# Altium PCB stm32f030F4P6-v2.00-定位孔.PcbDoc
Units mm, origin at the board's own origin, x right, y up, seen from the top; angles counter-clockwise.
Board outline 152.4 x 101.6 mm, 2 copper layers (Top Layer, Bottom Layer); 4 components, 25 nets, 32 pads, 0 vias.
Unrouted connection lines stored in the file: 7.
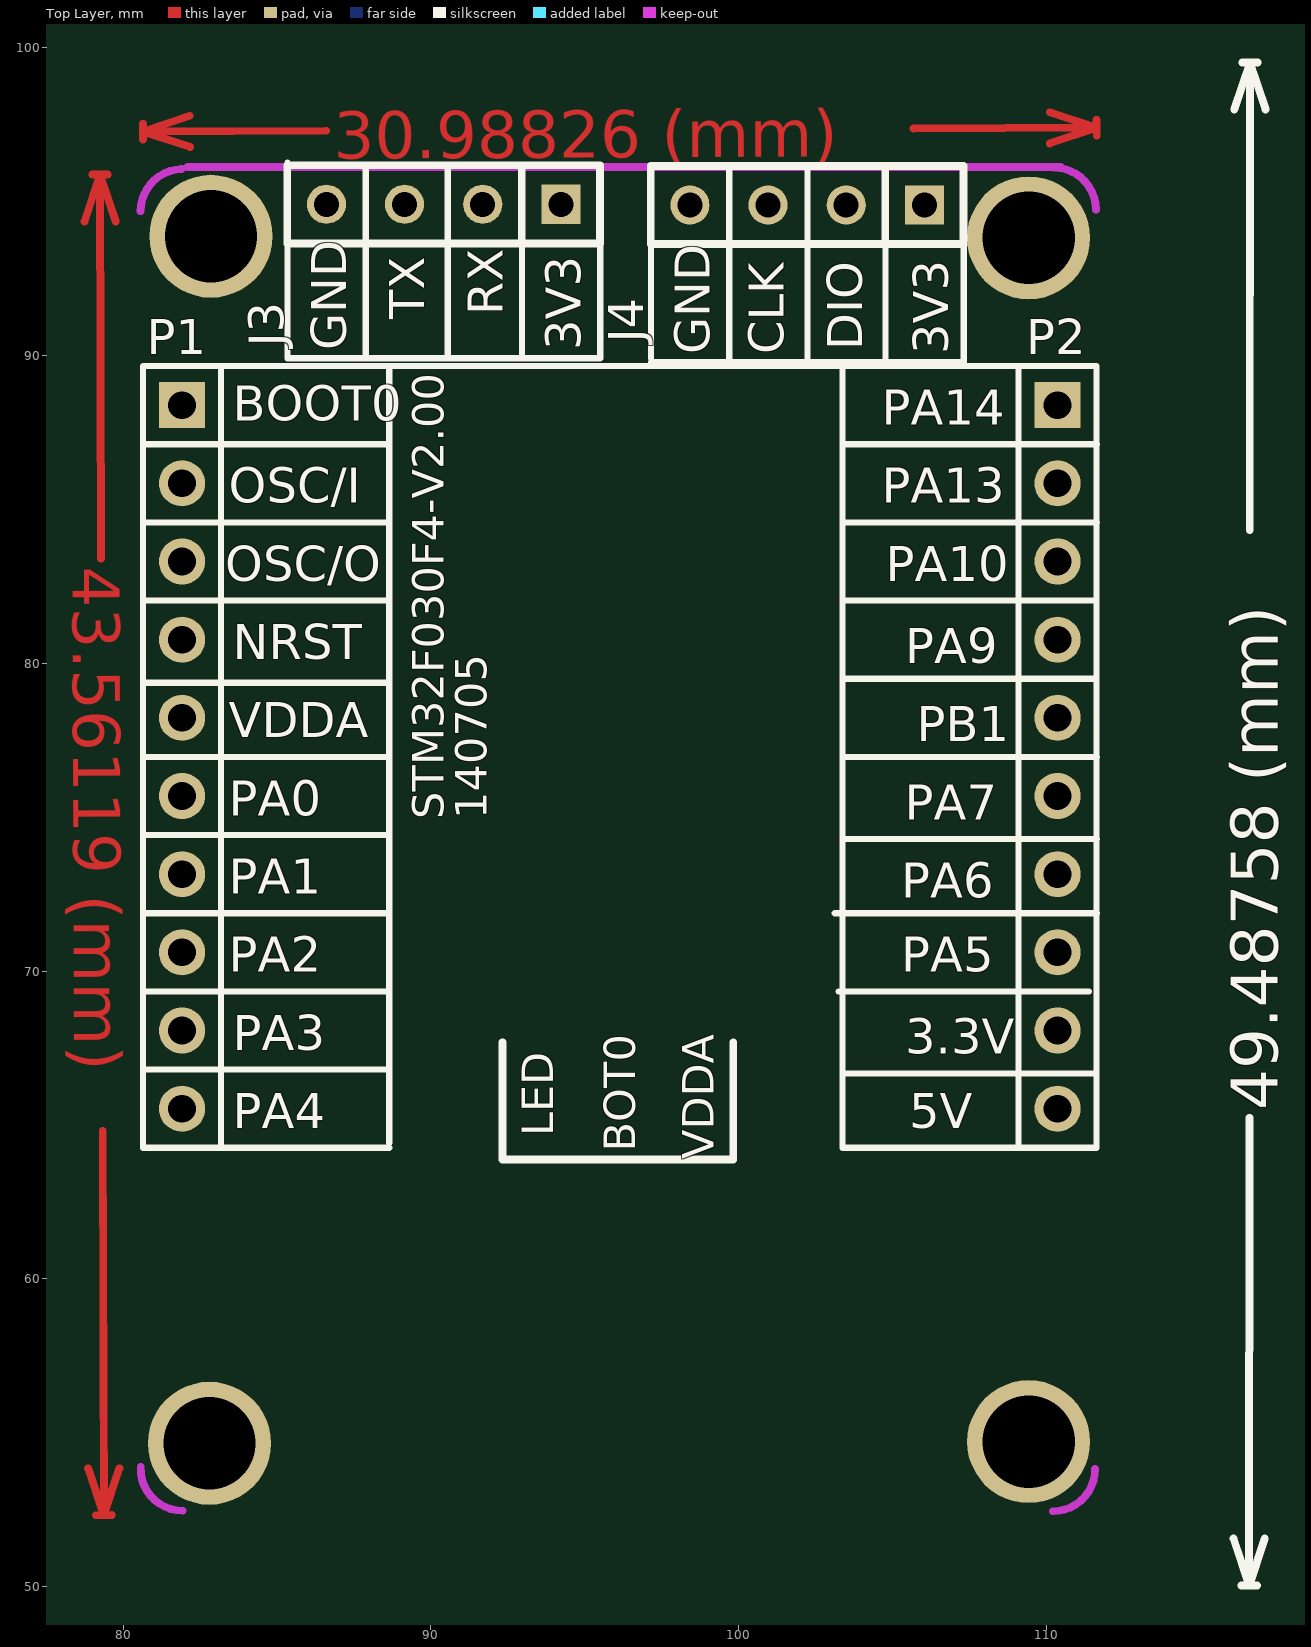
[diagram p0: Top Layer view]
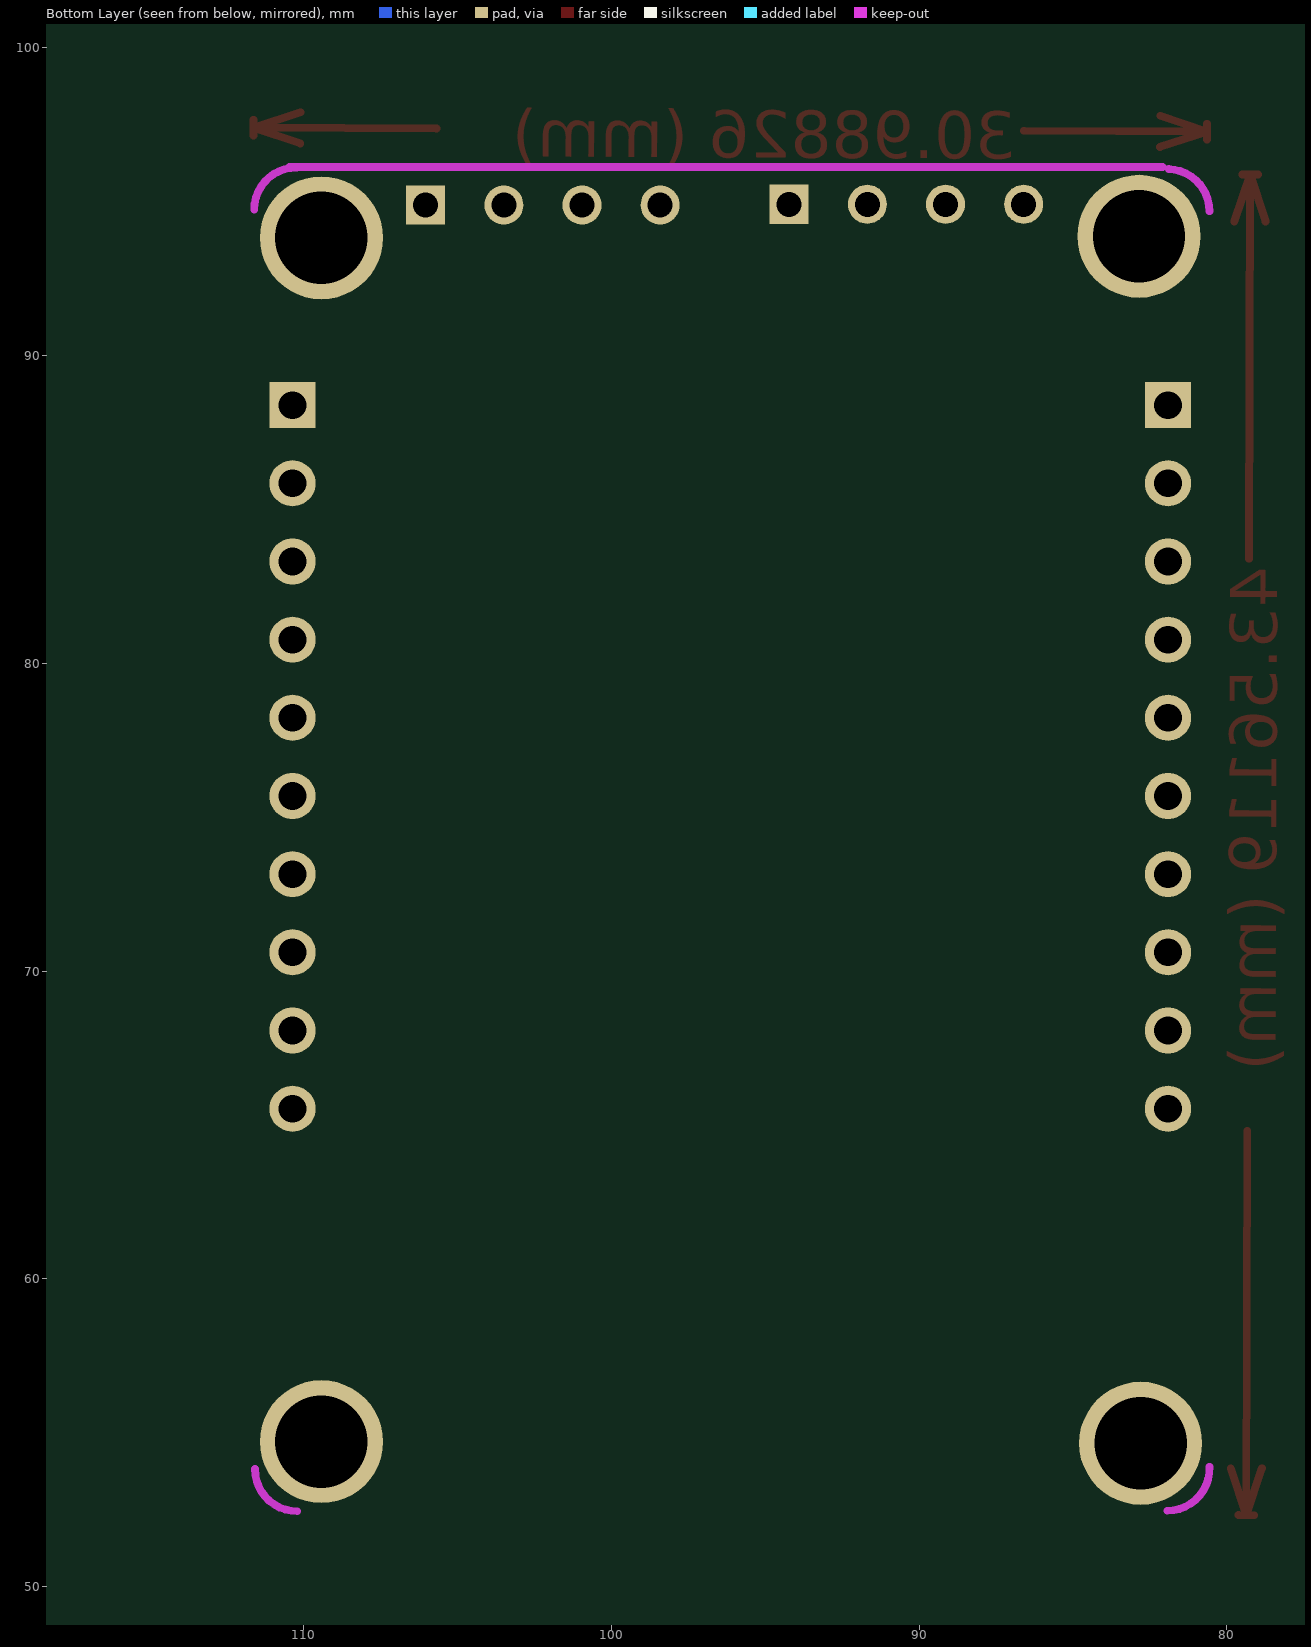
[diagram p1: Bottom Layer view, seen from below]

## Layer stack, top to bottom
Top Layer: signal copper 0.0356
Dielectric: dielectric 0.32, FR-4, Dk 4.8
Bottom Layer: signal copper 0.0356

## Board outline
25.4,25.4 177.8,25.4 177.8,127 25.4,127

## Design rules (kind name [scope] priority, off if disabled: settings)
Clearance [All] p1: gap=0.178
PolygonConnect [All] p1: connectstyle=Relief reliefconductorwidth=0.254 reliefentries=4 polygonreliefangle="90 Angle"
RoutingVias [All] p1: holewidth=0.711 width=1.27 viastyle="Through Hole" minholewidth=0.711 minwidth=1.27 maxholewidth=0.711 maxwidth=1.27
SilkscreenOverComponentPads [All] p1: minsilkscreentomaskgap=0.254
SolderMaskExpansion [All] p1: expansion=0.102
Width [InNet('3.3V')] p1: maxlimit=0.762 minlimit=0.254 preferedwidth=0.406
27 further rules are at their usual default settings.

## Components (designator, comment, footprint, x,y, rotation, side; value= is the part's Value field where it differs from the comment)
J3 "CON4" sip4 94.234,94.92 r180 top
J4 "CON4" sip4 106.045,94.894 r180 top
P1 "Header 10" HDR1X10 81.915,88.392 r270 top
P2 "Header 10" HDR1X10 110.363,88.392 r270 top

## Footprints (in the part's own frame and the unit in brackets; to place one, negate y for a bottom-side part, rotate by r counter-clockwise, add the part's x,y. Pads: shape width x height; smd on the part's side, far side on the other; paste and mask are expansions set on the pad)
HDR1X10 [mm] "Connector; Header; 10 Position"
  rect 1.5x1.5 hole 0.9: 1(0,0)
  round 1.5 hole 0.9: 2(2.54,0) 3(5.08,0) 4(7.62,0) 5(10.16,0) 6(12.7,0) 7(15.24,0) 8(17.78,0) 9(20.32,0) 10(22.86,0)
  silkscreen extent -1.27,-1.27 24.13,1.27
sip4 [mil]
  rect 50x50 hole 32: 1(0.38,0.07)
  round 50 hole 32: 2(100.38,0.07) 3(200.38,0.07) 4(300.38,0.07)
  silkscreen extent -50,-50 350,50

## Part data
J3 J4: "Connector"
P1 P2: "Header, 10-Pin"

## Free pads (board coordinates)
  round 4 hole 3: 0(109.423,93.828) 1(82.855,93.878) 2(109.423,54.712) 3(82.804,54.661)

## Nets (pads, with @x,y where several pads share a name; then routed paths per layer and width w, separated by ;. In a path a pad name is that pad's centre, name@x,y a point inside that pad or via, vN(x,y) a via of type N, cw(c..) or ccw(c..) an arc to the next point about the centre after c; other vN are vias at no path point)
3.3V: J3.1 J4.1 P2.9
+5V: P2.10
BOOT0: P1.1
BOT0: 
GND: J3.4 J4.4
LED: 
NetD1_1: 
NetPow_1: 
NRST: P1.4
OSC_IN: P1.2
OSC_OUT: P1.3
PA0: P1.6
PA1: P1.7
PA2: P1.8
PA3: P1.9
PA4: P1.10
PA5: P2.8
PA6: P2.7
PA7: P2.6
PA9: J3.3 P2.4
PA10: J3.2 P2.3
PA13: J4.2 P2.2
PA14: J4.3 P2.1
PB1: P2.5
VDDA: P1.5
copper on no net: | length 51.8
  Top Layer w0.254: 78.744,94.36 79.248,95.885 ; 78.863,53.847 79.375,52.324 ; 78.994,95.884 79.502,95.886 ; 79.121,52.323 79.629,52.325 ; 79.284,83.398 79.248,95.885 ; 79.339,64.811 79.375,52.324 ; 79.76,94.362 79.248,95.885 ; 79.879,53.849 79.375,52.324 ; 80.644,97.536 80.646,97.028 ; 82.167,97.796 80.645,97.282 ; 82.171,96.78 80.645,97.282 ; 86.592,97.306 80.645,97.282 ; 105.686,97.385 111.633,97.409 ; 110.107,97.911 111.633,97.409 ; 110.111,96.895 111.633,97.409 ; 111.632,97.663 111.634,97.155

## Keep-outs
Keep-Out Layer:
  lines w0.254: 80.569,94.691 cw(c81.94,94.691) 81.893,96.062 ; 80.57,53.896 ccw(c81.94,53.838) 81.94,52.466 ; 82.093,96.129 110.465,96.129 ; 110.211,52.451 ccw(c110.211,53.823) 111.582,53.823 ; 110.236,96.114 cw(c110.236,94.742) 111.608,94.742

## Other copper
Top Layer:
  text "30.98826 (mm)" at 86.849,96.393 h1.52 r0.23
  text "43.56119 (mm)" at 78.371,83.141 h1.52 r270.17

## Silkscreen, mask and mechanical layers (free items; w line width, h text height)
Top Overlay:
  lines w0.203: 80.645,64.262 88.646,64.262 ; 80.645,66.802 88.646,66.802 ; 80.645,69.342 88.646,69.342 ; 80.645,71.882 88.646,71.882 ; 80.645,74.422 88.646,74.422 ; 80.645,76.962 88.646,76.962 ; 80.645,79.375 88.646,79.375 ; 80.645,82.042 88.646,82.042 ; 80.645,84.582 88.646,84.582 ; 80.772,87.122 88.646,87.122 ; 80.772,89.662 104.902,89.662 ; 85.344,96.266 85.344,89.916 95.504,89.916 95.504,96.139 ; 87.884,89.916 87.884,96.139 ; 88.646,64.414 88.646,89.662 ; 90.551,89.916 90.551,96.139 ; 92.964,89.916 92.964,96.139 ; 97.155,89.789 107.315,89.789 107.315,96.139 ; 97.155,89.916 97.155,96.139 ; 99.695,89.789 99.695,96.012 ; 102.235,89.789 102.235,96.012 ; 103.124,71.882 111.633,71.882 ; 103.124,89.662 109.576,89.662 ; 103.251,69.342 111.379,69.342 ; 103.378,66.675 111.506,66.675 ; 103.378,79.502 111.506,79.502 ; 103.378,82.042 111.506,82.042 ; 103.378,89.789 103.378,64.262 111.506,64.262 ; 103.505,74.295 111.633,74.295 ; 103.505,76.962 111.633,76.962 ; 103.505,84.582 111.633,84.582 ; 103.505,87.122 111.633,87.122 ; 104.775,89.789 104.775,96.012
  lines w0.254: 92.329,67.691 92.329,63.881 99.822,63.881 99.822,67.691 ; 116.079,51.562 116.586,50.038 ; 116.106,98.002 116.615,99.526 ; 116.332,50.038 116.84,50.038 ; 116.361,99.526 116.869,99.525 ; 116.595,65.234 116.586,50.038 ; 116.606,84.329 116.615,99.526 ; 117.095,51.562 116.586,50.038 ; 117.122,98.001 116.615,99.526
  text "RX" at 92.329,91.313 h1.14 r90
  text "TX" at 89.789,91.186 h1.14 r90
  text "GND" at 87.249,90.17 h1.14 r90
  text "3V3" at 94.869,90.17 h1.14 r90
  text "DIO" at 104.013,90.17 h1.14 r90
  text "GND" at 99.06,90.043 h1.14 r90
  text "CLK" at 101.473,90.043 h1.14 r90
  text "3V3" at 106.807,90.043 h1.14 r90
  text "BOOT0" at 83.566,87.884 h1.14
  text "PA14" at 104.648,87.757 h1.14
  text "OSC/I" at 83.439,85.217 h1.14
  text "PA13" at 104.648,85.217 h1.14
  text "OSC/O" at 83.312,82.677 h1.14
  text "PA10" at 104.775,82.677 h1.14
  text "NRST" at 83.566,80.137 h1.14
  text "PA9" at 105.408,80.008 h1.14
  text "VDDA" at 83.439,77.597 h1.14
  text "PB1" at 105.791,77.47 h1.14
  text "PA0" at 83.439,75.057 h1.14
  text "STM32F030F4-V2.00" at 90.424,74.93 h1.02 r90
  text "140705" at 91.821,74.93 h1.02 r90
  text "PA7" at 105.393,74.913 h1.14
  text "PA1" at 83.439,72.517 h1.14
  text "PA6" at 105.283,72.39 h1.14
  text "PA2" at 83.439,69.977 h1.14
  text "PA5" at 105.283,69.977 h1.14
  text "PA3" at 83.566,67.437 h1.14
  text "3.3V" at 105.41,67.31 h1.14
  text "49.48758 (mm)" at 117.509,65.488 h1.52 r89.97
  text "PA4" at 83.566,64.897 h1.14
  text "5V" at 105.537,64.897 h1.14
  text "LED" at 93.98,64.643 h1.02 r90
  text "BOT0" at 96.647,64.135 h1.02 r90
  text "VDDA" at 99.187,63.881 h1.02 r90
Mechanical 1:
  lines w0.254: 80.57,53.896 80.57,94.69 ; 81.94,52.466 110.338,52.466 ; 111.582,53.823 111.608,94.742